# EAGLE board CT_schematic (EAGLE 7.6.0)

Size 100 x 80 mm. Coordinates in mm from the lower left corner, seen from the top.
Outline: 0,0 100,0 100,80 0,80 0,0
Copper layers (1*16): Top 0.035mm / dielectric 1.5mm / Bottom 0.035mm
Design rules "default": minimum track width 10mil, minimum drill 24mil, track to track 8mil, track to pad 8mil, pad to pad 8mil, via to via 8mil, smd to smd 8mil, copper to edge 40mil, drill to drill 8mil, minimum pad ring 10mil, minimum via ring 8mil, stop-mask expansion 4mil, vias tented up to drill 0mil, thermal gap 10mil

## Footprints (pad centres in the part's own frame; a part is rotated, then mirrored left to right if it is on the bottom)
C0603 = smd 0.8 x 0.8: 1 -0.762,0; 2 0.762,0
C0402 = smd 0.5 x 0.5: 1 -0.508,0; 2 0.508,0
C0805 = smd 1.2 x 1.3: 1 -1.016,0; 2 1.016,0
C1210 = smd 1.2 x 2.5: 1 -1.524,0; 2 1.524,0
EXV-9H = smd 3.505 x 1.676: 1 -2.857,0; 2 2.857,0
PJ-037B_PACKAGE = drill 3.7 square: 1 12,0 | drill 3.2 square: 2 6,0
R0603 = smd 0.8 x 0.8: 1 -0.762,0; 2 0.762,0
WLCSP64 = smd 0.34 x 0.34: A1 -1.75,1.75; A2 -1.25,1.75; A3 -0.75,1.75; A4 -0.25,1.75; A5 0.25,1.75; A6 0.75,1.75; A7 1.25,1.75; A8 1.75,1.75; B1 -1.75,1.25; B2 -1.25,1.25; B3 -0.75,1.25; B4 -0.25,1.25; B5 0.25,1.25; B6 0.75,1.25; B7 1.25,1.25; B8 1.75,1.25; C1 -1.75,0.75; C2 -1.25,0.75; C3 -0.75,0.75; C4 -0.25,0.75; C5 0.25,0.75; C6 0.75,0.75; C7 1.25,0.75; C8 1.75,0.75; D1 -1.75,0.25; D2 -1.25,0.25; D3 -0.75,0.25; D4 -0.25,0.25; D5 0.25,0.25; D6 0.75,0.25; D7 1.25,0.25; D8 1.75,0.25; E1 -1.75,-0.25; E2 -1.25,-0.25; E3 -0.75,-0.25; E4 -0.25,-0.25; E5 0.25,-0.25; E6 0.75,-0.25; E7 1.25,-0.25; E8 1.75,-0.25; F1 -1.75,-0.75; F2 -1.25,-0.75; F3 -0.75,-0.75; F4 -0.25,-0.75; F5 0.25,-0.75; F6 0.75,-0.75; F7 1.25,-0.75; F8 1.75,-0.75; G1 -1.75,-1.25; G2 -1.25,-1.25; G3 -0.75,-1.25; G4 -0.25,-1.25; G5 0.25,-1.25; G6 0.75,-1.25; G7 1.25,-1.25; G8 1.75,-1.25; H1 -1.75,-1.75; H2 -1.25,-1.75; H3 -0.75,-1.75; H4 -0.25,-1.75; H5 0.25,-1.75; H6 0.75,-1.75; H7 1.25,-1.75; H8 1.75,-1.75
SOIC-8 = smd 1.6 x 0.6: 1 -2.7,1.905 | smd 1.55 x 0.6: 2 -2.7,0.635; 3 -2.7,-0.635; 4 -2.7,-1.905; 5 2.7,-1.905; 6 2.7,-0.635; 7 2.7,0.635; 8 2.7,1.905
SAMTEC_FTSH-105-01-L-DV-K = smd 0.762 x 2.794: 1 -2.54,-2.032; 2 -2.54,2.032; 3 -1.27,-2.032; 4 -1.27,2.032; 5 0,-2.032; 6 0,2.032; 7 1.27,-2.032; 8 1.27,2.032; 9 2.54,-2.032; 10 2.54,2.032
TDFN-8/6MM = smd 0.3 x 0.75: 1 0,0; 2 0.5,0; 3 1,0; 4 1.5,0; 5 1.5,3; 6 1,3; 7 0.5,3; 8 0,3
182-009-MALE = drill 1.194 pad 1.524 octagon: 1 -5.537,10.923; 2 -2.769,10.923; 3 0,10.923; 4 2.769,10.923; 5 5.537,10.923; 6 -4.153,8.08; 7 -1.384,8.08; 8 1.384,8.08; 9 4.153,8.08 | hole 3.048: -12.446,9.501; 12.446,9.501
XB24CZ7UIS-004 = smd 2.84 x 1.52: 1 -10,6; 2 -10,4; 3 -10,2; 4 -10,0; 5 -10,-2; 6 -10,-4; 7 -10,-6; 8 -10,-8; 9 -10,-10; 10 -10,-12; 11 -10,-14; 12 -10,-16; 13 -10,-18; 21 10,-18; 22 10,-16; 23 10,-14; 24 10,-12; 25 10,-10; 26 10,-8; 27 10,-6; 28 10,-4; 29 10,-2; 30 10,0; 31 10,2; 32 10,4; 33 10,6; 34 10,8; 35 10,10; 36 10,12; 37 10,14 | smd 1.52 x 2.84: 14 -6,-19.68; 15 -4,-19.68; 16 -2,-19.68; 17 0,-19.68; 18 2,-19.68; 19 4,-19.68; 20 6,-19.68
ABS07-32.768KHZ-7-T = smd 1.1 x 2.4: 1 -2.5,0; 2 0,0
ASFL1 = smd 1.7 x 1.5: 1 -1.27,-1.1; 2 1.27,-1.1; 3 1.27,1.1; 4 -1.27,1.1
SOIC-8_EP = smd 1.6 x 0.533: 1 -2.921,1.905; 2 -2.921,0.635; 3 -2.921,-0.635; 4 -2.921,-1.905; 5 2.921,-1.905; 6 2.921,-0.635; 7 2.921,0.635; 8 2.921,1.905 | smd 2.54 x 3.302: EPAD 0,0 | drill 0.406 pad 0.406: P$1 -0.508,0.635; P$2 0.381,0.635; P$3 -0.508,-0.635; P$4 0.381,-0.635
SON-6 = smd 0.55 x 0.3: 1 -0.355,0.5 | smd 0.52 x 0.3: 2 -0.37,0; 3 -0.37,-0.5; 4 0.37,-0.5; 5 0.37,0; 6 0.37,0.5
SW_4-1437565-2 = smd 1.4 x 2.1: 1 -2.23,4.55; 2 -2.23,-4.55; 3 2.23,4.55; 4 2.23,-4.55
LGM67K-G1J2-24-Z = smd 0.8 x 1.4: A -2,0; C 0,0
NC7SZ125M5X = smd 1.3 x 0.7: 1 -1.3,0.95; 2 -1.3,0; 3 -1.3,-0.95; 4 1.3,-0.95; 5 1.3,0.95

## Placement (x,y rotation side)
C1  1e-06  [C0603]  -31.75,87.63 0 top  (outside the outline)
C2  1e-07  [C0603]  -35.56,87.63 0 top  (outside the outline)
C3  1e-07  [C0603]  -39.37,87.63 0 top  (outside the outline)
C4  1e-07  [C0603]  -43.18,87.63 0 top  (outside the outline)
C5  1e-07  [C0603]  -46.99,87.63 0 top  (outside the outline)
C6  1e-07  [C0603]  -50.8,87.63 0 top  (outside the outline)
C7  4.7e-06  [C0603]  -24.13,87.63 0 top  (outside the outline)
C8  1e-08  [C0603]  -54.61,87.63 0 top  (outside the outline)
C9  1e-06  [C0603]  -58.42,87.63 0 top  (outside the outline)
C10  1e-11  [C0402]  -31.75,92.71 0 top  (outside the outline)
C11  1e-11  [C0402]  -35.56,92.71 0 top  (outside the outline)
C12  1e-08  [C0402]  -39.37,92.71 0 top  (outside the outline)
C13  1e-07  [C0402]  -43.18,92.71 0 top  (outside the outline)
C14  1e-08  [C0402]  -46.99,92.71 0 top  (outside the outline)
C15  1e-07  [C0402]  -50.8,92.71 0 top  (outside the outline)
C16  1e-05  [C0805]  -72.39,76.2 0 top  (outside the outline)
C17  1e-07  [C0402]  -54.61,92.71 0 top  (outside the outline)
C18  4.7e-11  [C0402]  -27.94,92.71 0 top  (outside the outline)
C19  8.2e-12  [C0603]  -27.94,87.63 0 top  (outside the outline)
C20  1e-08  [C0402]  -58.42,92.71 0 top  (outside the outline)
C21  1e-05  [C1210]  -29.21,76.2 0 top  (outside the outline)
C22  1e-05  [C1210]  -35.56,76.2 0 top  (outside the outline)
C23  1e-05  [C1210]  -41.91,76.2 0 top  (outside the outline)
C24  1e-05  [C1210]  -48.26,76.2 0 top  (outside the outline)
C25  1e-07  [C0402]  -62.23,92.71 0 top  (outside the outline)
C26  0.0001  [EXV-9H]  -33.02,68.58 0 top  (outside the outline)
C27  0.0001  [EXV-9H]  -44.45,68.58 0 top  (outside the outline)
C28  1e-08  [C0402]  -66.04,92.71 0 top  (outside the outline)
C29  1e-08  [C0402]  -69.85,92.71 0 top  (outside the outline)
C30  1e-08  [C0402]  -73.66,92.71 0 top  (outside the outline)
J1  PJ-037B  [PJ-037B_PACKAGE]  -57.15,46.99 0 top  (outside the outline)
R2  1000.0  [R0603]  -62.23,87.63 0 top  (outside the outline)
R4  4700.0  [R0603]  -66.04,87.63 0 top  (outside the outline)
R5  4700.0  [R0603]  -69.85,87.63 0 top  (outside the outline)
R6  2200.0  [R0603]  -73.66,87.63 0 top  (outside the outline)
R7  2200.0  [R0603]  -77.47,87.63 0 top  (outside the outline)
R8  10000.0  [R0603]  -30.48,82.55 0 top  (outside the outline)
R9  10000.0  [R0603]  -35.56,82.55 0 top  (outside the outline)
R10  10000.0  [R0603]  -40.64,82.55 0 top  (outside the outline)
R11  10000.0  [R0603]  -45.72,82.55 0 top  (outside the outline)
R12  10000.0  [R0603]  -50.8,82.55 0 top  (outside the outline)
R13  10000.0  [R0603]  -55.88,82.55 0 top  (outside the outline)
R14  10000.0  [R0603]  -60.96,82.55 0 top  (outside the outline)
R15  10000.0  [R0603]  -66.04,82.55 0 top  (outside the outline)
R16  5.0  [R0603]  -81.28,87.63 0 top  (outside the outline)
R17  10000.0  [R0603]  -71.12,82.55 0 top  (outside the outline)
R18  10000.0  [R0603]  -76.2,82.55 0 top  (outside the outline)
R19  10000.0  [R0603]  -81.28,82.55 0 top  (outside the outline)
R20  120.0  [R0603]  -15.24,92.71 0 top  (outside the outline)
R21  470000.0  [R0603]  -15.24,82.55 0 top  (outside the outline)
R22  4031.5447154472  [R0603]  -81.28,74.93 0 top  (outside the outline)
R23  2200.0  [R0603]  -19.05,92.71 0 top  (outside the outline)
R24  10000.0  [R0603]  -15.24,87.63 0 top  (outside the outline)
R25  10000.0  [R0603]  -20.32,87.63 0 top  (outside the outline)
R26  9100.0  [R0603]  -22.86,92.71 0 top  (outside the outline)
R27  680000.0  [R0603]  -20.32,82.55 0 top  (outside the outline)
R28  120000.0  [R0603]  -25.4,82.55 0 top  (outside the outline)
U1  STM32L431RCY6  [WLCSP64]  -24.13,68.58 0 top  (outside the outline)
U2  AT25020B-SSHL-T  [SOIC-8]  -40.64,58.42 0 top  (outside the outline)
U3  FTSH-105-01-L-DV-K  [SAMTEC_FTSH-105-01-L-DV-K]  -35.56,46.99 0 top  (outside the outline)
U4  24AA32AT-I/MNY  [TDFN-8/6MM]  -25.4,58.42 0 top  (outside the outline)
U5  SN65HVD230D  [SOIC-8]  -54.61,58.42 0 top  (outside the outline)
U6  182-009-113R531  [182-009-MALE]  -62.23,6.35 0 top  (outside the outline)
U7  XB24CZ7UIS-004  [XB24CZ7UIS-004]  -25.4,21.59 0 top  (outside the outline)
U8  ABS07-32.768KHZ-7-T  [ABS07-32.768KHZ-7-T]  -66.04,68.58 0 top  (outside the outline)
U9  ASFL1-25MHZ-NCS  [ASFL1]  -72.39,58.42 0 top  (outside the outline)
U10  MIC5234YME  [SOIC-8_EP]  -74.93,67.31 0 top  (outside the outline)
U11  TPS3895ADRYR  [SON-6]  -76.2,91.44 0 top  (outside the outline)
U12  4-1437565-2  [SW_4-1437565-2]  -73.66,45.72 0 top  (outside the outline)
U13  Q65110A2395  [LGM67K-G1J2-24-Z]  -17.78,76.2 0 top  (outside the outline)
U14  nc7sz125m5x  [NC7SZ125M5X]  -53.34,74.93 0 top  (outside the outline)
U15  nc7sz125m5x  [NC7SZ125M5X]  -59.69,74.93 0 top  (outside the outline)
U16  nc7sz125m5x  [NC7SZ125M5X]  -66.04,74.93 0 top  (outside the outline)

## Library data of the parts
C1-C30 J1 R2 R4-R28 U1-U16 = circuit_tree

## Nets
CLK_CRYSTAL_U1_C7: C10.1 U1.C7 U8.1
CLK_CRYSTAL_U1_C8: C11.1 U1.C8 U8.2
CLK_U1_D8: U1.D8 U9.3
GND: C1.2 C2.2 C3.2 C4.2 C5.2 C6.2 C7.2 C8.2 C9.2 C10.2 C11.2 C12.2 C13.2 C14.2 C15.2 C16.2 C17.2 C18.2 C19.2 C20.2 C21.2 C22.2 C23.2 C24.2 C25.2 C26.2 C27.2 C28.2 C29.2 C30.2 J1.2 R2.2 R8.2 R15.2 R16.2 R17.2 R19.2 R21.2 R23.2 R26.2 R28.2 U1.A7 U1.B1 U1.F8 U1.H2 U1.H8 U2.4 U3.3 U3.5 U4.4 U5.2 U6.5 U7.1 U7.11 U7.13 U7.22 U7.35 U9.2 U10.7 U10.EPAD U11.2 U13.C U14.2 U14.3 U15.1 U15.3 U16.1 U16.3
NET_U1_A6: R7.1 U1.A6 U4.5
NET_U1_B5: R6.1 U1.B5 U4.6
NET_U1_C5: R8.1 U1.C5
NET_U1_D6: R5.1 U1.D6 U16.4
NET_U1_H5: U13.A
NET_U1_H6: U12.3 U12.4
NET_U2_3: R9.1 U2.3
NET_U2_7: R11.1 U2.7
NET_U3_9: R16.1 U3.9
NET_U4_1: R17.1 U4.1
NET_U4_2: R18.1 U4.2
NET_U4_3: R19.1 U4.3
NET_U5_6: R20.2 U5.6
NET_U5_8: R21.1 U5.8
NET_U6_2: R20.2 U5.6 U6.2
NET_U6_3: R20.1 U5.7 U6.3
NET_U7_6: R4.1 U7.6 U15.4
NET_U10_4: R22.2 R23.1 U10.4
NET_U11_1: R25.1 R26.1 U11.1
NET_U11_3: R27.2 R28.1 U11.3
NET_U11_4: R24.1 U11.4 U14.4 U15.2 U16.2
NET_U12_1: R2.1 U12.1 U12.2
PROC_CAN1_RX: U1.C6 U5.4
PROC_CAN1_TX: U1.B6 U5.1
PROC_SPI1_MISO: U1.B4 U7.17
PROC_SPI1_MOSI: U1.C1 U7.16
PROC_SPI1_NSS: U1.E5 U7.15
PROC_SPI1_SCK: U1.F5 U7.14
PROC_SPI2_MISO: U1.E7 U2.2
PROC_SPI2_MOSI: U1.E6 U2.5
PROC_SPI2_NSS: R10.1 U1.G3 U2.1
PROC_SPI2_SCK: U1.G2 U2.6
PROC_SYS_JTCK_SWCLK: R15.1 U1.B2 U3.4
PROC_SYS_JTDI: R13.1 U1.A2 U3.8
PROC_SYS_JTDO_SWO: U1.A5 U3.6
PROC_SYS_JTMS_SWDIO: R14.1 U1.C2 U3.2
RST_OUT_U3_JTAG_RST_B: R12.1 U3.10 U14.1
VCC_S1_13V2: C21.1 C22.1 C26.1 C27.1 J1.1 U10.5 U10.8
VCC_TIER1_3V3: C1.1 C2.1 C3.1 C4.1 C5.1 C6.1 C7.1 C8.1 C9.1 C12.1 C13.1 C14.1 C15.1 C16.1 C17.1 C18.1 C19.1 C20.1 C23.1 C24.1 C25.1 C28.1 C29.1 C30.1 R4.2 R5.2 R6.2 R7.2 R9.2 R10.2 R11.2 R12.2 R13.2 R14.2 R18.2 R22.1 R24.2 R25.2 R27.1 U1.A1 U1.A8 U1.B7 U1.G8 U1.H1 U1.H7 U2.8 U3.1 U4.7 U4.8 U5.3 U7.2 U7.27 U9.4 U10.1 U11.6 U14.5 U15.5 U16.5

## Tracks (layer width: path | path; a pad name or v marks a point on that pad's centre or on a via)
CLK_CRYSTAL_U1_C7  (2 unrouted)
CLK_CRYSTAL_U1_C8  (2 unrouted)
CLK_U1_D8  (1 unrouted)
GND  (67 unrouted)
NET_U1_A6  (2 unrouted)
NET_U1_B5  (2 unrouted)
NET_U1_C5  (1 unrouted)
NET_U1_D6  (2 unrouted)
NET_U1_H6  (1 unrouted)
NET_U2_3  (1 unrouted)
NET_U2_7  (1 unrouted)
NET_U3_9  (1 unrouted)
NET_U4_1  (1 unrouted)
NET_U4_2  (1 unrouted)
NET_U4_3  (1 unrouted)
NET_U5_6  (1 unrouted)
NET_U5_8  (1 unrouted)
NET_U6_2  (2 unrouted)
NET_U6_3  (2 unrouted)
NET_U7_6  (2 unrouted)
NET_U10_4  (2 unrouted)
NET_U11_1  (2 unrouted)
NET_U11_3  (2 unrouted)
NET_U11_4  (4 unrouted)
NET_U12_1  (2 unrouted)
PROC_CAN1_RX  (1 unrouted)
PROC_CAN1_TX  (1 unrouted)
PROC_SPI1_MISO  (1 unrouted)
PROC_SPI1_MOSI  (1 unrouted)
PROC_SPI1_NSS  (1 unrouted)
PROC_SPI1_SCK  (1 unrouted)
PROC_SPI2_MISO  (1 unrouted)
PROC_SPI2_MOSI  (1 unrouted)
PROC_SPI2_NSS  (2 unrouted)
PROC_SPI2_SCK  (1 unrouted)
PROC_SYS_JTCK_SWCLK  (2 unrouted)
PROC_SYS_JTDI  (2 unrouted)
PROC_SYS_JTDO_SWO  (1 unrouted)
PROC_SYS_JTMS_SWDIO  (2 unrouted)
RST_OUT_U3_JTAG_RST_B  (2 unrouted)
VCC_S1_13V2  (6 unrouted)
VCC_TIER1_3V3  (57 unrouted)